# Altium PCB OSSI-1 LED Controller.PcbDoc
Units mil, origin at the board's own origin, x right, y up, seen from the top; angles counter-clockwise.
Board outline 3701 x 3465 mil, 2 copper layers (Top, Bottom), stack 61.811 mil thick; 80 components, 90 nets, 280 pads, 119 vias.
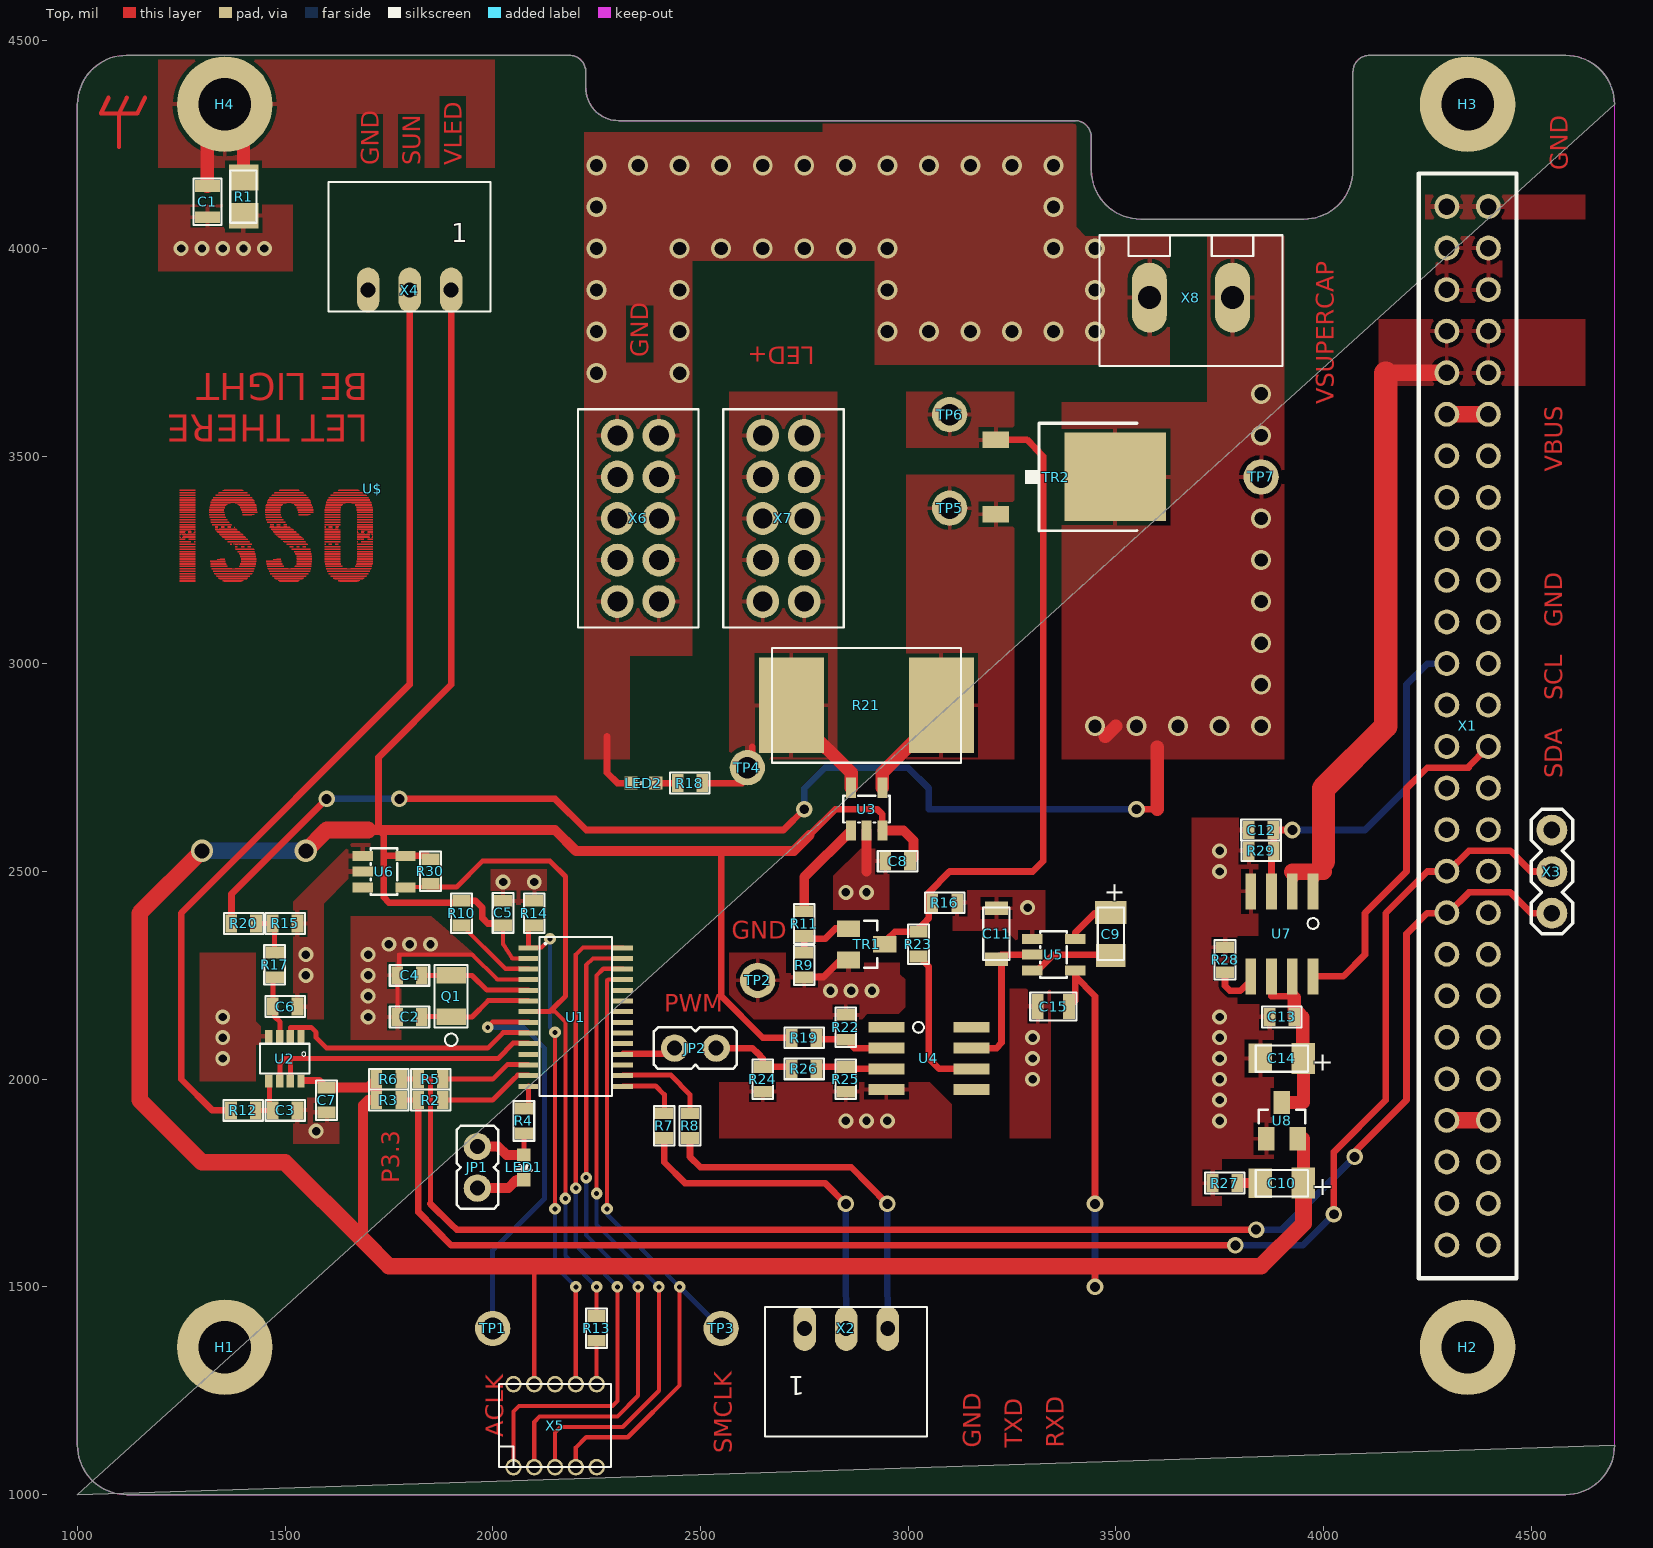
[diagram p0: Top view]
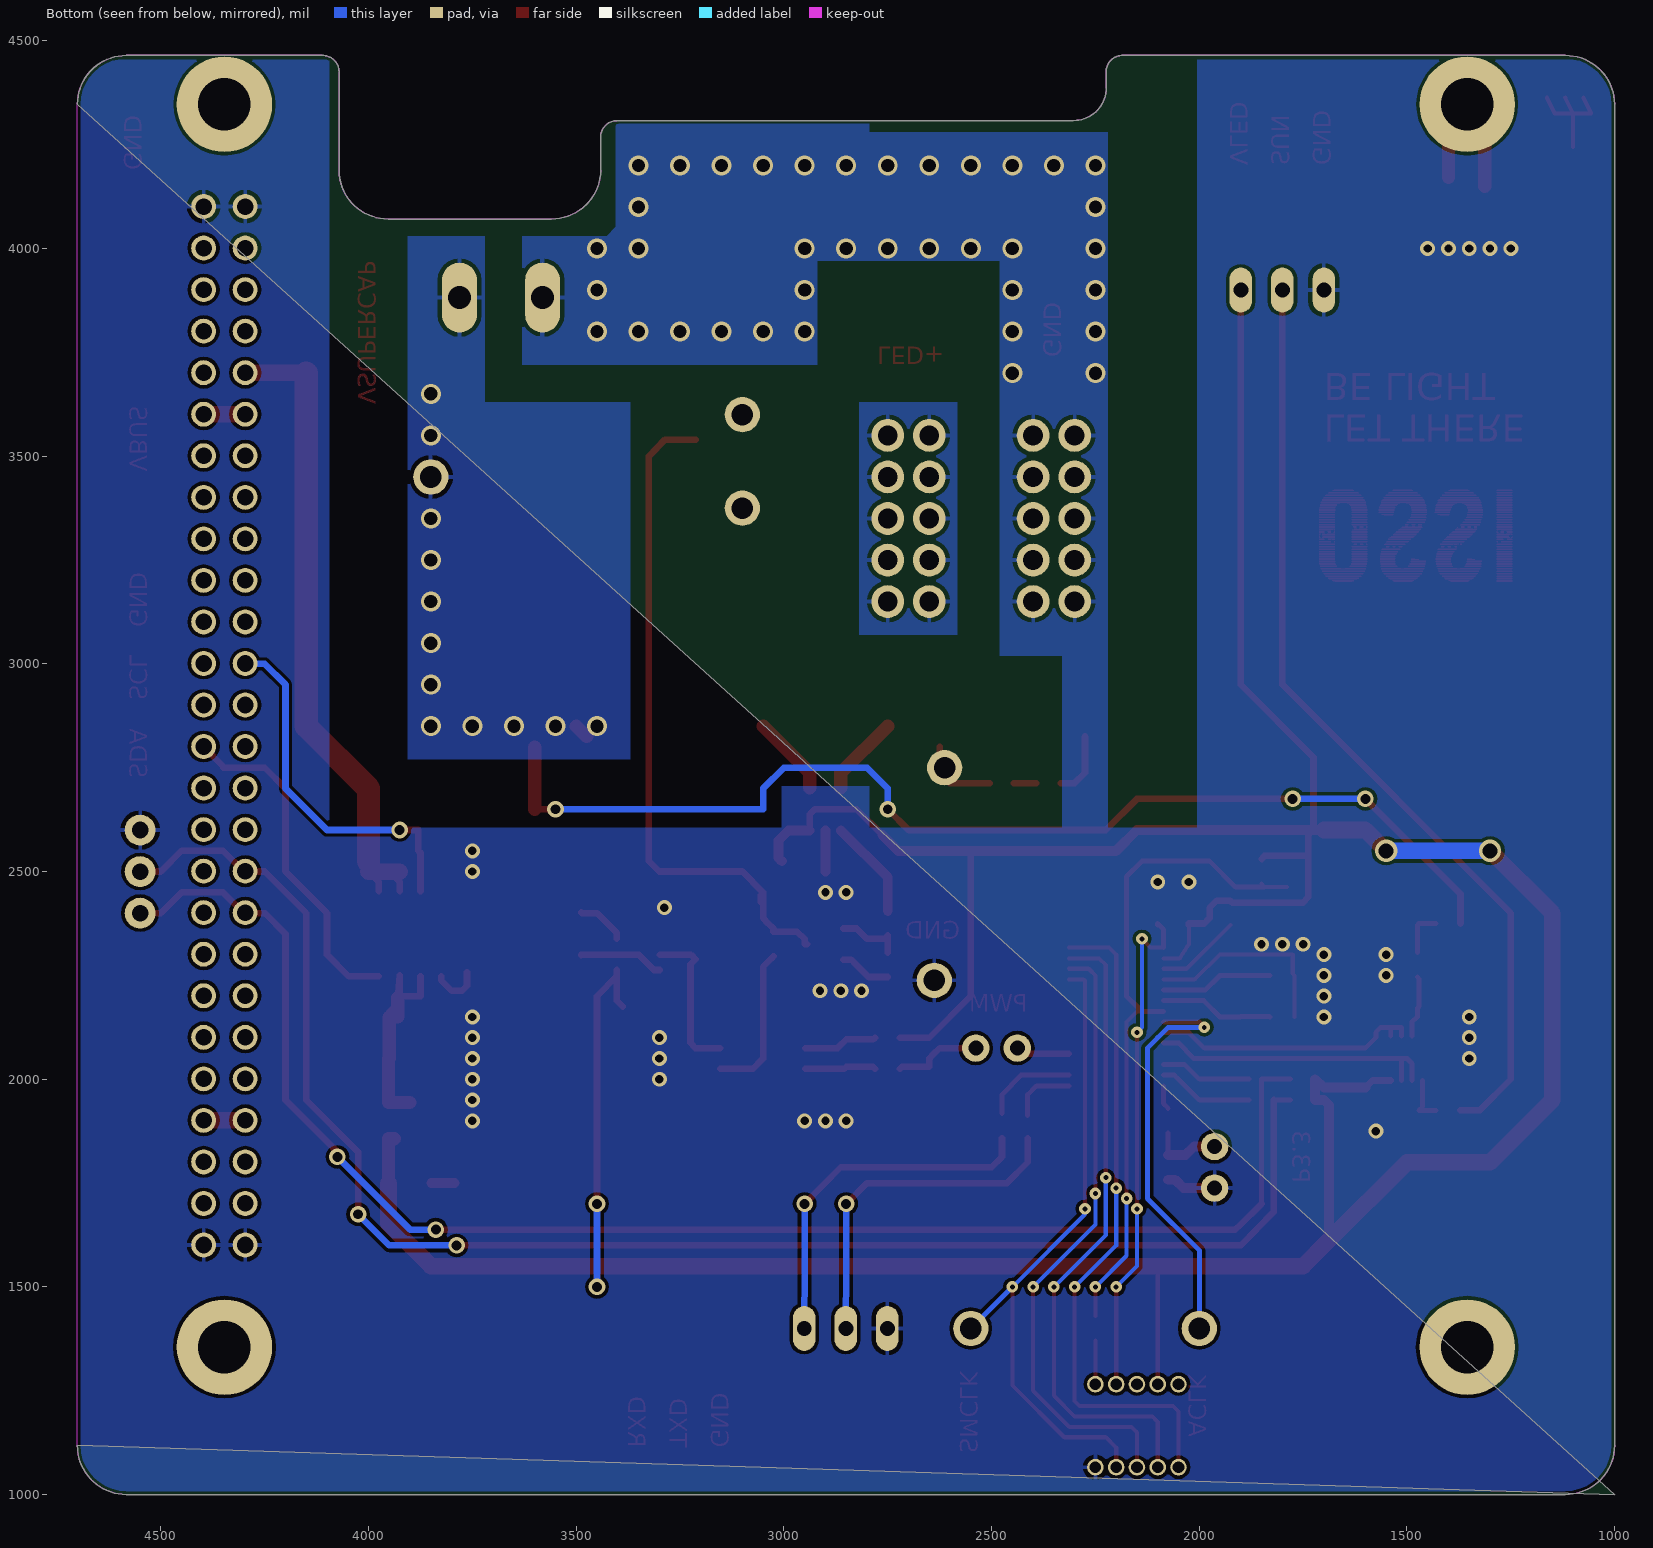
[diagram p1: Bottom view, seen from below]

## Layer stack, top to bottom
Top Solder: solder mask 0.4, Solder Resist, Dk 3.5
Top: signal copper 1.378
Dielectric 1: core 59.0551, FR-4, Dk 4.8
Bottom: signal copper 1.378
Bottom Solder: solder mask 0.4, Solder Resist, Dk 3.5

## Board outline
4701,1119 cw(c4582.5,1118.5) 4583,1000 1119,1000 cw(c1119,1119) 1000,1119 1000,4347 cw(c1118.5,4346.5) 1119,4465 2185,4465 cw(c2185,4426) 2224,4426 2224,4386 ccw(c2302.5,4386.5) 2303,4308 2733,4308 2736,4308 3402,4308 cw(c3401.5,4268.5) 3441,4268 3441,4189 ccw(c3559.5,4189.5) 3560,4071 3953,4071 ccw(c3953,4189) 4071,4189 4071,4426 cw(c4110.5,4425.5) 4111,4465 4583,4465 cw(c4583,4347) 4701,4347 1000,1000

## Design rules (kind name [scope] priority, off if disabled: settings)
Clearance mdViaVia [IsVia vs IsVia] p1: gap=8
Clearance mdPadVia [IsPad vs IsVia] p2: gap=8
Clearance mdPadPad [IsPad vs IsPad] p3: gap=8
Clearance mdWireVia [(InLayerClass('Signal Layers') AND IsTrack) vs IsVia] p4: gap=8
Clearance mdWirePad [(InLayerClass('Signal Layers') AND IsTrack) vs IsPad] p5: gap=8
Clearance mdWireWire [(InLayerClass('Signal Layers') AND IsTrack) vs (InLayerClass('Signal Layers') AND IsTrack)] p6: gap=8
Clearance [All] p7: gap=8
HoleSize [All] p1: absolutevalues=TRUE maxlimit=100000 minlimit=24 maxpercent=80.000 minpercent=20.000
HoleToHoleClearance [All] p1: gap=8 allowstackedmicrovias=TRUE
PolygonConnect ThermalVias [IsVia] p1: connectstyle=Direct reliefconductorwidth=10 reliefentries=4 polygonreliefangle="90 Angle" airgapwidth=10
PolygonConnect [All] p2: connectstyle=Relief reliefconductorwidth=10 reliefentries=4 polygonreliefangle="90 Angle" airgapwidth=10
RoutingVias [All] p1: holewidth=28 width=50 viastyle="Through Hole" minholewidth=28 minwidth=50 maxholewidth=28 maxwidth=50
SilkToSilkClearance [All] p1 off: silktosilkclearance=10
SilkToSolderMaskClearance [IsPad] p1 off: minsilkscreentomaskgap=10 clearancetoexposedcopper=TRUE
SolderMaskExpansion [All] p1: expansion=4
Width [All] p1: maxlimit=100000 minlimit=10 preferedwidth=10
26 further rules are at their usual default settings.

## Components (designator, comment, footprint, x,y, rotation, side; value= is the part's Value field where it differs from the comment)
C1 "DNP" C0805(2012) 1313,4113 r270 top
C2 "12.5pF" C0603(1608) 1800,2150 r180 top
C3 "100nF" C0603(1608) 1500,1925 r0 top
C4 "12.5pF" C0603(1608) 1800,2250 r180 top
C5 "100nF" C0603(1608) 2025,2400 r90 top
C6 "100nF" C0603(1608) 1500,2175 r0 top
C7 "100nF" C0603(1608) 1600,1950 r270 top
C8 "100nF" C0603(1608) 2975,2525 r180 top
C9 "10uF, LDO Tantal 16V" C1206(3216)-A 3488,2350 r270 top
C10 "10uF, LDO Tantal 16V" C1206(3216)-A 3900,1750 r180 top
C11 "4.7uF, 1206 Cap" C1206-GCM31 3213,2350 r90 top
C12 "1uF" C0603(1608) 3850,2600 r180 top
C13 "100nF" C0603(1608) 3900,2150 r180 top
C14 "10uF, LDO Tantal 16V" C1206(3216)-A 3900,2050 r180 top
C15 "1uF 0805" C0805(2012) 3350,2175 r180 top
H1 "" 3.2-PAD-ROUND 1355,1355 r0 top
H2 "" 3.2-PAD-ROUND 4347,1355 r0 top
H3 "" 3.2-PAD-ROUND 4347,4347 r0 top
H4 "" 3.2-PAD-ROUND 1355,4347 r0 top
JP1 "" JP1 1963,1788 r0 top
JP2 "" JP1 2488,2075 r90 top
LED1 "" LED-0603 2075,1788 r180 top
LED2 "" CHIPLED_0603 2363,2713 r90 top
Q1 "NX-3215" NX-3215 1900,2200 r90 top
R1 "DNP" WSL1206 1400,4125 r90 top
R2 "250" R0603(1608) 1850,1950 r0 top
R3 "10k" R0603(1608) 1750,1950 r180 top
R4 "1k" R0603(1608) 2075,1900 r270 top
R5 "250" R0603(1608) 1850,2000 r0 top
R6 "10k" R0603(1608) 1750,2000 r180 top
R7 "4.7k" R0603(1608) 2413,1888 r90 top
R8 "4.7k" R0603(1608) 2475,1888 r90 top
R9 "3k" R0603(1608) 2750,2275 r270 top
R10 "TBD" R0603(1608) 1925,2400 r270 top
R11 "5.1k" R0603(1608) 2750,2375 r270 top
R12 "1k" R0603(1608) 1400,1925 r180 top
R13 "4.7k" R0603(1608) 2250,1400 r90 top
R14 "47k" R0603(1608) 2100,2400 r270 top
R15 "100k" R0603(1608) 1500,2375 r0 top
R16 "DNP" R0603(1608) 3088,2425 r0 top
R17 "1k" R0603(1608) 1475,2275 r90 top
R18 "1.5k" R0603(1608) 2475,2713 r180 top
R19 "2.4k" R0603(1608) 2750,2100 r180 top
R20 "100k" R0603(1608) 1400,2375 r0 top
R21 "0.005, 2W RSENSE" R4527(12070) 2900,2900 r180 top
R22 "1.1k" R0603(1608) 2850,2125 r90 top
R23 "1k" R0603(1608) 3025,2325 r90 top
R24 "100k" R0603(1608) 2650,2000 r270 top
R25 "DNP" R0603(1608) 2850,2000 r270 top
R26 "1.5k" R0603(1608) 2750,2025 r180 top
R27 "0" R0603(1608) 3763,1750 r180 top
R28 "TBD" R0603(1608) 3763,2288 r270 top
R29 "100k" R0603(1608) 3850,2550 r0 top
R30 "100k" R0603(1608) 1850,2500 r90 top
TP1 "TP" TP-13 2000,1400 r0 top
TP2 "TP" TP-13 2638,2238 r0 top
TP3 "TP" TP-13 2550,1400 r0 top
TP4 "TP" TP-13 2613,2750 r0 top
TP5 "TP" TP-13 3100,3375 r0 top
TP6 "TP" TP-13 3100,3600 r0 top
TP7 "TP" TP-13 3850,3450 r0 top
TR1 "FDV301N" SOT23 2900,2325 r270 top
TR2 "FDD8896" TO252 3400,3450 r270 top
U1 "MSP430F2132" PW28 2200,2150 r270 top
U2 "OPA2347" SOT23-8DCN 1500,2050 r180 top
U3 "MAX4376" SOT23-5DBV 2900,2650 r0 top
U4 "LM7321" SO8 3050,2050 r270 top
U5 "MAX1682" SOT23-5DBV 3350,2300 r270 top
U6 "TPS3838" SOT23-5DBV 1738,2500 r270 top
U7 "MAX890L" SO8 3900,2350 r180 top
U8 "MCP1700_SOT23" SOT23 3900,1900 r0 top
U$ "" OSSILOGORECT1005 1711,3422 r180 top
X1 "ESQ-126-38-G-D" ESQ-126-XX-X-D 4347,2851 r0 top
X2 "5268-03" 5268-03 2851,1400 r180 top
X3 "" 1X03 4550,2400 r90 top
X4 "5268-03" 5268-03 1800,3900 r0 top
X5 "JTAG10PINMINI-H" M50-3200545 2150,1166 r0 top
X6 "ICCON_POWERCON" ICCON6643220-1 2350,3350 r0 top
X7 "ICCON_POWERCON" ICCON6643220-1 2700,3350 r0 top
X8 "WEIDMULLER" WEIDMULLER1760490000 3681,3882 r0 top

## Footprints (in the part's own frame and the unit in brackets; to place one, negate y for a bottom-side part, rotate by r counter-clockwise, add the part's x,y. Pads: shape width x height; smd on the part's side, far side on the other; paste and mask are expansions set on the pad)
1X03 [mil] "1X03"
  round 74 hole 40: 1(0,0) 2(100,0) 3(200,0)
  silkscreen extent -50,-50 250,50
3.2-PAD-ROUND [mil] "3.2-PAD-ROUND"
  round 230 hole 126: B3,2(0,0)
5268-03 [mil] "5268-03"
  oval 54x108 hole 36: 1(100,0) 2(0,0) 3(-100,0)
  silkscreen extent -195,-51 195,260
C0603(1608) [mil] "C0603(1608)"
  rect 28x44 smd: 1(-29.53,0) 2(30,0)
  silkscreen extent -47,-25 48,25
C0805(2012) [mil] "C0805(2012)"
  rect 28x60 smd: 1(-37.4,0) 2(38,0)
  silkscreen extent -55,-33 56,34
C1206(3216)-A [mil] "C1206(3216)-A"
  rect 56x75 smd: 1(-51.18,0)
  rect 56x71 smd: 2(52,0)
  silkscreen extent -63,-31 63,32
C1206-GCM31 [mil] "C1206-GCM31"
  rect 32x56 smd: P$1(-61.02,0) P$2(62,0)
  silkscreen extent -63,-31 63,32
CHIPLED_0603 [mil] "CHIPLED_0603"
  rect 32x32 smd: A(0,-29.53) C(0,30)
  silkscreen extent -5,0 5,10
ESQ-126-XX-X-D [mil] "ESQ-126-XX-X-D"
  round 60 hole 40: 1(-50,1250) 2(50,1250) 3(-50,1150) 4(50,1150) 5(-50,1050) 6(50,1050) 7(-50,950) 8(50,950) 9(-50,850) 10(50,850) 11(-50,750) 12(50,750) 13(-50,650) 14(50,650) 15(-50,550) 16(50,550) 17(-50,450) 18(50,450) 19(-50,350) 20(50,350) 21(-50,250) 22(50,250) 23(-50,150) 24(50,150) 25(-50,50) 26(50,50) 27(-50,-50) 28(50,-50) 29(-50,-150) 30(50,-150) 31(-50,-250) 32(50,-250) 33(-50,-350) 34(50,-350) 35(-50,-450) 36(50,-450) 37(-50,-550) 38(50,-550) 39(-50,-650) 40(50,-650) 41(-50,-750) 42(50,-750) 43(-50,-850) 44(50,-850) 45(-50,-950) 46(50,-950) 47(-50,-1050) 48(50,-1050) 49(-50,-1150) 50(50,-1150) 51(-50,-1250) 52(50,-1250)
  silkscreen extent -117,-1330 118,1330
ICCON6643220-1 [mil] "ICCON6643220-1"
  round 79 hole 48: 1(-50,200) 2(-50,100) 3(-50,0) 4(-50,-100) 5(-50,-200) 6(50,-200) 7(50,-100) 8(50,0) 9(50,100) 10(50,200)
  silkscreen extent -145,-262 145,263
JP1 [mil] "JP1"
  round 66 hole 36: 1(0,-50) 2(0,50)
  silkscreen extent -50,-100 50,100
LED-0603 [mil] "LED-0603"
  rect 32x32 smd: A(0,-29.53) C(0,30)
  silkscreen extent -18,-6 19,7
M50-3200545 [mil] "M50-3200545"
  round 40 hole 28: 1(-100,-100) 2(-100,100) 3(-50,-100) 4(-50,100) 5(0,-100) 6(0,100) 7(50,-100) 8(50,100) 9(100,-100) 10(100,100)
  silkscreen extent -135,-100 135,100
NX-3215 [mil] "NX-3215"
  rect 40x71 smd: 1(-49.21,0) 2(50,0)
  silkscreen extent -120,-39 75,40
OSSILOGORECT1005 [mil] "OSSILOGORECT1005"
  Top drawing of 1356 lines, arcs and shapes, not listed
PW28 [mil] "PW28"
  rect 12x48 smd: 1(-166.5,-114.49) 2(-140.91,-114.49) 3(-115.32,-114.49) 4(-89.73,-114.49) 5(-64.14,-114.49) 6(-38.55,-114.49) 7(-12.96,-114.49) 8(13,-114.49) 9(39,-114.49) 10(64,-114.49) 11(90,-114.49) 12(116,-114.49) 13(141,-114.49) 14(167,-114.49) 15(167,114) 16(141,114) 17(116,114) 18(90,114) 19(64,114) 20(39,114) 21(13,114) 22(-12.96,114) 23(-38.55,114) 24(-64.14,114) 25(-89.73,114) 26(-115.32,114) 27(-140.91,114) 28(-166.5,114)
  silkscreen extent -192,-87 190,87
R0603(1608) [mil] "R0603(1608)"
  rect 28x44 smd: 1(-29.53,0) 2(30,0)
  silkscreen extent -47,-25 48,25
R4527(12070) [mil] "R4527(12070)"
  rect 156x230 smd: P$1(-180.12,0) P$2(181,0)
  silkscreen extent -228,-138 228,138
SO8 [mil] "SO8"
  rect 26x87 smd: 1(-75,-102.36) 2(-25,-102.36) 3(25,-102.36) 4(75,-102.36) 5(75,103) 6(25,103) 7(-25,103) 8(-75,103)
  silkscreen extent -88,-38 -62,-12
SOT23 [mil] "SOT23"
  rect 40x56 smd: 1(-37.4,-43.31) 2(38,-43.31) 3(0,44)
  silkscreen extent -56,-6 56,26
SOT23-5DBV [mil] "SOT23-5DBV"
  rect 24x49 smd: 1(-37.4,-51.18) 2(0,-51.18) 3(38,-51.18) 4(38,52) 5(-37.4,52)
  silkscreen extent -56,-32 56,32
SOT23-8DCN [mil] "SOT23-8DCN"
  rect 18x32 smd: 1(-38.39,-53.15) 2(-12.8,-53.15) 3(13,-53.15) 4(39,-53.15) 5(39,54) 6(13,54) 7(-12.8,54) 8(-38.39,54)
  silkscreen extent -59,-35 60,36
TO252 [mil] "TO252"
  rect 213x245 smd: D(0,99)
  rect 40x63 smd: G(-89.76,-188.98) S(90,-188.98)
  silkscreen extent -129,-119 130,151
TP-13 [mil] "TP-13"
  round 85 hole 52: TP(0,0)
WEIDMULLER1760490000 [mil] "WEIDMULLER1760490000"
  oval 84x168 hole 56: 1(100,0) 2(-100,0)
  silkscreen extent -220,-165 220,150
WSL1206 [mil] "WSL1206"
  rect 62x71 smd: P$1(-45.87,0) P$2(46,0)
  silkscreen extent -63,-31 63,32

## Part data
C1 C15: library part C0805(2012)
C2 C3 C4 C5 C6 C7 C8 C12 C13: library part C0603(1608)
C9 C10 C14: library part C1206(3216)-A
C11: library part C1206-GCM31
H1 H2 H3 H4: library part 3.2-PAD-ROUND
JP1 JP2: library part JP1
LED1: library part LED-0603
LED2: library part CHIPLED_0603
R1: library part WSL1206
R2 R3 R4 R5 R6 R7 R8 R9 R10 R11 R12 R13 R14 R15 R16 R17 R18 R19 R20 R22 R23 R24 R25 R26 R27 R28 R29 R30: library part R0603(1608)
R21: library part R4527(12070)
TP1 TP2 TP3 TP4 TP5 TP6 TP7: library part TP-13
TR1 U8: library part SOT23
TR2: library part TO252
U1: library part PW28
U2: library part SOT23-8DCN
U3 U5 U6: library part SOT23-5DBV
U4 U7: library part SO8
U$: library part OSSILOGORECT1005
X1: library part ESQ-126-XX-X-D
X3: library part 1X03
X5: library part M50-3200545
X6 X7: library part ICCON6643220-1
X8: library part WEIDMULLER1760490000

## Via types
v1: diameter 48/48 (per signal layer), hole 32, Top to Bottom, 49 vias
v2: diameter 36/36 (per signal layer), hole 20, Top to Bottom, 40 vias
v3: diameter 28/28 (per signal layer), hole 12, Top to Bottom, 15 vias
v4: diameter 40/40 (per signal layer), hole 24, Top to Bottom, 13 vias
v5: diameter 54/54 (per signal layer), hole 36, Top to Bottom, 2 vias

## Nets (pads, with @x,y where several pads share a name; then routed paths per layer and width w, separated by ;. In a path a pad name is that pad's centre, name@x,y a point inside that pad or via, vN(x,y) a via of type N, cw(c..) or ccw(c..) an arc to the next point about the centre after c; other vN are vias at no path point)
3.3VLED: C5.1 C7.1 C8.1 C10.1 C15.1 R3.2 R6.2 R10.1 R19.2 R30.2 U1.2 U2.8 U3.3 U5.4 U6.5 U8.2 X4.1 X5.4 | length 10294.5
  Top w10: C5.1@2025,2371 2025,2325 2047,2291 U1.2@2086,2291 ; X5.4 2100,1550
  Top w16: U2.8@1539,1997 1583,1997 C7.1@1600,1980 ; R30.2 1843,2538 1789,2538 1738,2538 ; X4.1 1900,2950 1725,2775 1725,2600 1738,2588 1738,2538 ; C5.1@2025,2371 2025,2375 1988,2375 1975,2388 1975,2413 1958,2430 1925,2430 1921,2425 1750,2425 1738,2438 1738,2538 ; 2550,2550 2550,2200 2650,2100 R19.2@2721,2100 ; 2763,2588 2825,2650 2925,2650 2938,2638 U3.3@2938,2599 ; C15.1@3388,2175 3402,2189 3402,2263 3402,2249 3450,2200 v4(3450,1700) ; v4(3450,1500) 3450,1550
  Top w24: C7.1@1600,1980 1700,1980 1721,2000 1721,1950 1700,1950 1688,1938 1688,1613 ; 1700,2600 1725,2600 2150,2600 2200,2550 2550,2550 2725,2550 2763,2588 ; U3.3@2938,2599 2989,2599 3013,2575 3013,2533 C8.1@3005,2525
  Top w32: U8.2@3938,1857 3952,1857 C10.1@3952,1750
  Top w40: v5(1300,2550) 1150,2400 1150,1950 1300,1800 1500,1800 1688,1613 1750,1550 2100,1550 3450,1550 3850,1550 3952,1652 C10.1@3952,1750 ; v5(1550,2550) 1600,2600 1700,2600
  Bottom w16: v4(3450,1500) v4(3450,1700)
  Bottom w40: v5(1300,2550) v5(1550,2550)
3.3VOBC: X1.45 X1.46 | length 100
  Top w40: X1.45 X1.46
ACLK_OUT: TP1.TP U1.8 | length 988.2
  Top w12: v3(1988,2125) 2000,2138 U1.8@2086,2138
  Bottom w12: v3(1988,2125) 2075,2125 2100,2100 2125,2075 2125,1713 2000,1588 TP1.TP
ADC1: U1.9 U2.1 U2.2 | length 659.7
  Top w12: U2.2@1513,2104 1513,2125 1538,2125 ; U2.1@1539,2104 1539,2125 1538,2125 ; U1.9@2086,2112 2025,2112 1988,2075 1600,2075 1575,2100 1575,2113 1563,2125 1538,2125
ADC2: U1.10 U2.6 U2.7 | length 712.6
  Top w12: U2.6@1488,1997 1488,2025 1488,2038 1500,2050 1513,2050 ; U2.7@1513,1997 1513,2050 ; U1.10@2086,2087 2049,2087 2013,2050 1600,2050 1550,2050 1513,2050
ANT_DEPLOY1: X1.19
ANT_DEPLOY2: X1.20
BAT_-CHRG: X1.42
BAT_-FAULT: X1.44
BAT_-ON: X1.38
BAT_TEMP: X1.47
BEACON_-FAULT: X1.30
BEACON_OFF: X1.24
BEACON_SCL: X1.37
BEACON_SDA: X1.39
BUS_CS: X1.27
COMMS_-FAULT: X1.32
COMMS_OFF: X1.25
COMMS_SCL: X1.41
COMMS_SDA: X1.43
GND: C1.2 C2.2 C3.2 C4.2 C5.2 C6.2 C7.2 C8.2 C11.P$2 C12.2 C13.2 C14.2 C15.2 JP1.1 LED1.C LED2.C R1.P$1 R9.2 R14.1 R15.2 R16.2 R22.2 R24.2 R25.2 R27.2 R28.1 R29.1 TP2.TP TR1.2 U1.4 U2.4 U3.2 U4.4 U5.1 U6.1 U6.2 U7.4 U8.1 X1.1 X1.2 X1.51 X1.52 X2.1 X3.3 X4.3 X5.9 X6.1 X6.2 X6.3 X6.4 X6.5 X6.6 X6.7 X6.8 X6.9 X6.10 X8.2 | length 986
  Top w10: C2.2@1771,2150 1771,2250 1775,2255 1775,2300 1950,2300 2011,2240 U1.4@2086,2240
  Top w16: 2275,2825 2275,2738 2300,2713 LED2.C ; R9.2@2750,2246 2796,2246 2825,2275 2838,2288 TR1.2@2857,2288
  Top w24: JP1.1 2038,1738 2058,1758 LED1.C ; 2900,2500 U3.2@2900,2599
  other v1: 2250,3700 2450,3700 2250,3800 2450,3800 2950,3800 3050,3800 3150,3800 3250,3800 3350,3800 3450,3800 2250,3900 2450,3900 2950,3900 3450,3900 2250,4000 2450,4000 2550,4000 2650,4000 2750,4000 2850,4000 2950,4000 3350,4000 3450,4000 2250,4100 3350,4100 2250,4200 2350,4200 2450,4200 2550,4200 2650,4200 2750,4200 2850,4200 2950,4200 3050,4200 3150,4200 3250,4200 3350,4200
  other v2: 1575,1875 2850,1900 2900,1900 2950,1900 3750,1900 3750,1950 3300,2000 3750,2000 1350,2050 3300,2050 3750,2050 1350,2100 3300,2100 3750,2100 1350,2150 1700,2150 3750,2150 1700,2200 2813,2213 2863,2213 2913,2213 1550,2250 1700,2250 1550,2300 1700,2300 1750,2325 1800,2325 1850,2325 3288,2413 2850,2450 2900,2450 2025,2475 2100,2475 3750,2500 3750,2550 1250,4000 1300,4000 1350,4000 1400,4000 1450,4000
LED_-FAULT: U7.8 X1.28 | length 833.1
  Top w16: U7.8@3975,2248 4048,2248 4100,2300 4100,2400 4200,2500 4200,2700 4250,2750 4347,2750 ; X1.28 4347,2750 ; 4347,2750 4350,2750 4347,2750
LED_OFF: C12.1 R29.2 U7.3 X1.23 | length 897.5
  Top w16: U7.3@3875,2453 3875,2546 R29.2 3880,2600 3888,2600 v4(3925,2600)
  Bottom w16: v4(3925,2600) 4100,2600 4200,2700 4200,2950 4250,3000 X1.23@4300,3000 ; X1.23@4288,3000 X1.23@4300,3000 ; X1.23 4300,3001 X1.23@4300,3000
LED_SCL: R2.1 R3.1 X1.33 X3.2 | length 3841.1
  Top w12: R3.1@1780,1950 R2.1@1821,1950
  Top w16: R2.1@1821,1950 1821,1680 1900,1600 3550,1600 3600,1600 v4(3788,1600) ; v4(4025,1675) 4025,1825 4150,1950 4150,2400 4250,2500 X1.33@4297,2500 ; X3.2 4500,2500 4450,2550 4350,2550 4300,2500 X1.33@4297,2500 ; X1.33@4297,2500 X1.33 X1.33@4297,2500
  Bottom w16: v4(3788,1600) 3950,1600 v4(4025,1675)
LED_SDA: R5.1 R6.1 X1.35 X3.1 | length 3700.4
  Top w12: R6.1@1780,2000 1821,2000 1850,2000 1850,1700
  Top w16: 1850,1700 1900,1650 1913,1638 3538,1638 3600,1638 v4(3838,1638) ; v4(4075,1813) 4075,1825 4200,1950 4200,2350 4250,2400 X1.35@4297,2400 ; X3.1 4500,2400 4450,2450 4350,2450 4301,2401 X1.35 X1.35@4297,2400 ; X1.35@4297,2400 4300,2400 X1.35@4297,2400
  Bottom w16: v4(3838,1638) 3900,1638 v4(4075,1813)
N$1: 
N$2: 
N$3: U1.28 X5.1 | length 1637.8
  Top w10: v3(2200,1738) 2200,1800 2200,2300 2217,2317 U1.28@2314,2317 ; v3(2300,1500) 2300,1300 2300,1225 2288,1213 2063,1213 2050,1200 X5.1 ; X5.1 2050,1063 X5.1
  Bottom w10: v3(2200,1738) 2200,1600 v3(2300,1500)
N$4: R10.2 U1.3 | length 204.2
  Top w10: R10.2@1925,2371 2031,2266 U1.3@2086,2266
N$5: C13.1 C14.1 U7.6 U7.7 U8.3 | length 541.2
  Top w10: C14.1@3950,2050 C14.1@3952,2050
  Top w16: U7.6@3875,2248 3875,2200 3925,2200 U7.7@3925,2250 ; 3930,2196 U7.7@3925,2250 ; U7.7@3925,2250 3925,2248 U7.7@3925,2250
  Top w32: U8.3 3952,1944 C14.1@3952,2050 ; C13.1@3930,2150 C13.1@3930,2171 ; 3930,2196 C13.1@3930,2171 ; C14.1@3950,2050 3950,2150 C13.1@3930,2171
N$6: R16.1 R23.2 TP6.TP TR1.3 TR2.G | length 1645.7
  Top w12: 3050,2450 3058,2443 R16.1@3058,2425
  Top w16: TR1.3 2950,2325 2950,2338 2968,2355 R23.2 3025,2363 3038,2375 3050,2388 3050,2450 3100,2500 3300,2500 3325,2525 3325,2763 3325,3500 3286,3540 TR2.G@3212,3540
N$7: C6.1 R17.1 U2.3 | length 150.8
  Top w12: R17.1@1475,2246 1471,2241 1471,2175 1475,2171 1475,2150 1488,2138 U2.3@1488,2104
N$8: C3.1 R12.1 U2.5 | length 116.7
  Top w12: R12.1@1430,1925 1471,1925 1462,1934 U2.5@1462,1997
N$9: R25.1 R26.1 U4.3 | length 172.1
  Top w16: R26.1@2780,2025 2785,2030 2850,2030 2855,2025 U4.3@2948,2025
N$10: R28.2 U7.5 | length 120.3
  Top w16: R28.2 3763,2225 3775,2213 3800,2213 3825,2238 U7.5@3825,2248
N$11: R15.1 R17.2 R20.2 | length 112.7
  Top w12: R20.2 1471,2375 1475,2371 R17.2
N$12: R18.1 R21.P$2 TP4.TP U3.5 X7.1 X7.2 X7.3 X7.4 X7.5 X7.6 X7.7 X7.8 X7.9 X7.10 | length 387.5
  Top w16: R18.1@2505,2713 2600,2713 2625,2738 2625,2800
  Top w32: R21.P$2@2750,2850 2863,2738 U3.5@2863,2702
N$13: C11.P$1 U4.7 U5.2 | length 374.2
  Top w16: U4.7 3213,2075 3225,2088 3225,2277 C11.P$1 3224,2300 U5.2@3299,2300
N$14: R23.1 U4.6 | length 376.8
  Top w16: R23.1@3030,2291 3025,2296 3050,2271 3050,2050 3075,2025 U4.6
N$15: U1.27 X5.3 | length 1569.5
  Top w10: X5.3 2100,1175 2113,1188 2300,1188 2350,1238 v3(2350,1500) ; v3(2225,1763) 2225,1800 2225,2275 2241,2291 U1.27@2314,2291
  Bottom w10: v3(2225,1763) 2225,1625 v3(2350,1500)
N$16: R21.P$1 TP5.TP TR2.S U3.4 | length 194.4
  Top w32: U3.4 2938,2738 R21.P$1@3050,2850
N$17: C10.2 R27.1 | length 56
  Top w24: R27.1@3793,1750 3800,1750 C10.2@3849,1750
N$18: R19.1 R22.1 U4.2 | length 178.1
  Top w16: R19.1@2780,2100 2785,2096 2850,2096 2871,2075 U4.2@2948,2075
N$19: C4.1 Q1.2 U1.5 | length 270.2
  Top w12: C4.1@1830,2250 1831,2250 Q1.2 1901,2250 1950,2250 1986,2215 U1.5@2086,2215
N$20: C2.1 Q1.1 U1.6 | length 273
  Top w12: C2.1@1830,2150 1831,2151 1900,2151 1901,2150 1950,2150 1989,2189 U1.6@2086,2189
N$21: JP1.2 LED1.A R4.2 | length 173.3
  Top w12: LED1.A@2075,1818 R4.2@2075,1871
  Top w24: JP1.2 2013,1838 2033,1818 LED1.A@2075,1818
N$22: R5.2 U1.12 | length 220.5
  Top w12: R5.2 2000,2000 2035,2035 U1.12@2086,2035
N$23: R2.2 U1.13 | length 230.9
  Top w12: R2.2 2000,1950 2050,2000 2060,2010 U1.13@2086,2010
N$24: R11.1 U3.1 | length 241.1
  Top w24: R11.1@2750,2405 2750,2487 U3.1@2863,2599
N$25: R4.1 U1.14 | length 58.6
  Top w12: R4.1@2075,1930 2086,1941 U1.14@2086,1984
N$26: C9.2 U5.3 | length 204.7
  Top w16: U5.3@3299,2263 3313,2263 3350,2300 3487,2300 C9.2@3488,2299
N$27: C9.1 U5.5 | length 121.1
  Top w16: U5.5@3402,2338 3402,2352 3450,2400 3487,2400 C9.1@3488,2402
N$28: R8.2 U1.16 | length 225.8
  Top w12: U1.16@2314,2010 2429,2010 2475,1963 R8.2
N$29: LED2.A R18.2 | length 117
  Top w16: R18.2@2446,2713 LED2.A@2393,2713 ; LED2.A@2393,2713 2425,2713 LED2.A@2393,2713
N$30: R9.1 R11.2 TR1.1 | length 161.7
  Top w16: R9.1@2750,2305 2750,2346 2758,2338 2800,2338 2825,2363 TR1.1@2857,2363
N$31: U1.26 X5.5 | length 1508.2
  Top w10: X5.5 2150,1150 2163,1163 2313,1163 2400,1250 v3(2400,1500) ; v3(2250,1725) 2250,1800 2250,2250 2266,2266 U1.26@2314,2266
  Bottom w10: v3(2250,1725) 2250,1650 v3(2400,1500)
N$32: R13.1 X5.10 | length 105
  Top w10: X5.10 R13.1@2250,1371
N$33: JP2.2 U1.18 | length 129.8
  Top w16: U1.18@2314,2061 2424,2061 JP2.2
N$39: R7.2 U1.15 | length 162.7
  Top w12: U1.15@2314,1984 2392,1984 2413,1963 2413,1925 R7.2 ; R7.2 2413,1913 R7.2
N$56: 
N$58:  | length 75
  Top w10: 1100,4244 1100,4319
N$59:  | length 214
  Top w10: 1075,4363 1057,4325 1100,4325 ; 1119,4363 1100,4325 ; 1163,4363 1144,4325 1100,4325
OBC_-FAULT: X1.34
OBC_OFF: X1.26
PANELTEMP_SCL: X1.29
PANELTEMP_SDA: X1.31
PWM: JP2.1 R24.1 R26.2 | length 215.5
  Top w16: JP2.1 2625,2075 2640,2061 2650,2050 2650,2030 2716,2030 R26.2@2721,2025
RESET_LED: R13.2 R30.1 U1.7 U6.4 | length 1616.4
  Top w10: U6.4@1789,2463 1843,2463 R30.1@1850,2471 ; 2138,2163 2150,2163 2175,2138 2175,1800 v3(2175,1713) ; R13.2 2250,1450 v3(2250,1500)
  Top w12: R30.1@1843,2463 1913,2463 1975,2525 2138,2525 2175,2488 2175,2200 2150,2175 2138,2163 U1.7@2086,2163
  Bottom w10: v3(2175,1713) 2175,1575 v3(2250,1500)
RXD: R8.1 X2.3 | length 867.1
  Top w16: R8.1@2475,1858 2475,1813 2500,1788 2863,1788 v4(2950,1700)
  Bottom w16: v4(2950,1700) 2950,1551 X2.3
SC_-ON: X1.40
SC_-PFO: X1.48
SCCHG_EN: X1.21
SCOUT_-PG: X1.50
SCOUT_EN: X1.22
SMCLK_OUT: TP3.TP U1.25 X5.7 | length 1587.6
  Top w10: X5.7 2200,1113 2225,1138 2325,1138 2450,1263 v3(2450,1500) ; v3(2275,1688) 2275,1800 2275,2238 2278,2240 U1.25@2314,2240
  Bottom w10: v3(2275,1688) 2275,1675 v3(2450,1500)
  Bottom w12: v3(2450,1500) TP3.TP
SOLAR_-ON: X1.36
SOLAR_CS1: X1.15
SOLAR_CS2: X1.14
SOLAR_CS3: X1.17
SOLAR_CS4: X1.16
SOLAR_CS5: X1.18
STRUT_GND: C1.1 H4.B3,2 R1.P$2 | length 292
  Top w32: C1.1@1313,4150 1313,4300 ; R1.P$2 1400,4313
SUN: R12.2 X4.2 | length 2279.9
  Top w16: R12.2@1371,1925 1325,1925 1250,2000 1250,2400 1800,2950 X4.2
SUPERCAP_TEMP: X1.49
TEST: R14.2 U1.1 X5.8 | length 1234.2
  Top w10: U1.1@2086,2317 2117,2317 v3(2138,2338) ; v3(2150,1688) 2150,1738 2150,1800 v3(2150,2113) ; X5.8 v3(2200,1500)
  Top w12: U1.1@2086,2317 2086,2361 R14.2@2100,2375 ; R14.2@2100,2371 R14.2@2100,2375 ; R14.2@2100,2371 R14.2@2100,2375 ; R14.2@2100,2371 R14.2@2100,2375
  Bottom w10: v3(2138,2338) 2138,2313 2138,2125 v3(2150,2113) ; v3(2150,1688) 2150,1550 v3(2200,1500)
TXD: R7.1 X2.2 | length 836.4
  Top w16: R7.1@2413,1858 2413,1800 2463,1750 2800,1750 v4(2850,1700)
  Bottom w16: v4(2850,1700) 2850,1550 X2.2
VBAT: X1.11 X1.12 | length 100
  Top w40: X1.11 X1.12
VBUS: U7.1 U7.2 X1.7 X1.8 X1.9 X1.10 | length 1624.3
  Top w16: U7.2@3925,2453 3925,2475 3950,2500 ; U7.1@3975,2453 3975,2475 4000,2500
  Top w24: 4000,2500 4000,2550
  Top w40: 3925,2500 3950,2500 4000,2500 ; 4150,3700 4151,3701 X1.9
  Top w56: 4000,2525 4000,2550 4000,2700 4150,2850 4150,3700
VSOLAR: X1.3 X1.4 X1.5 X1.6
VSUPERCAP: R20.1 TP7.TP TR2.D X8.1 | length 2773.4
  Top w16: R20.1@1371,2375 1371,2446 v4(1600,2675) ; v4(1775,2675) 2150,2675 2225,2600 2700,2600 v4(2750,2650) ; v4(3550,2650) 3600,2650
  Top w32: 3475,2825 3500,2850 ; 3600,2650 3600,2800
  Bottom w16: v4(1600,2675) v4(1775,2675) ; v4(2750,2650) 2750,2700 2800,2750 3000,2750 3050,2700 3050,2650 v4(3550,2650)
  other v1: 3450,2850 3550,2850 3650,2850 3750,2850 3850,2850 3850,2950 3850,3050 3850,3150 3850,3250 3850,3350 3850,3550 3850,3650
pads on no net: H1.B3,2 H2.B3,2 H3.B3,2 U1.11 U1.17 U1.19 U1.20 U1.21 U1.22 U1.23 U1.24 U4.1 U4.5 U4.8 U6.3 X1.13 X5.2 X5.6

## Polygon pours and split planes (outlines as drawn)
VSOLAR on Top "Top-VSOLAR" (solid, remove dead copper, pour order 2): 4300,4030 4430,4030 4430,3870 4270,3870 4270,4030
GND on Top "Top-GND" (solid, remove dead copper, pour order 4): 3630,4030 3630,3720 2920,3720 2920,3970 2480,3970 2480,3020 2330,3020 2330,2770 2220,2770 2220,4280 2795,4280 2795,4455 3405,4455 3405,4052.07 3427.07,4030
GND on Top "Top-GND 1" (solid, remove dead copper, pour order 10): 1780,2095 1780,2393 1658,2393 1658,2095
GND on Top "Top-GND 2" (solid, remove dead copper, pour order 12): 3843,2630 3843,2345 3793,2345 3793,2180 3880,2180 3880,1808 3755,1808 3755,1695 3683,1695 3683,2630
GND on Top "Top-GND 3" (solid, remove dead copper, pour order 14): 1995,2505 1995,2420 2130,2420 2130,2505
GND on Top "Top-GND 4" (solid, remove dead copper, pour order 16): 1520,2145 1520,2427.07 1660.93,2568 1705,2568 1705,2483 1652.09,2483 1593,2422.95 1593,2145
GND on Top "Top-GND 5" (solid, remove dead copper, pour order 18): 1520,1955 1520,1845 1630,1845 1630,1930 1580,1930 1580,1955
GND on Top "Top-GND 6" (solid, remove dead copper, pour order 20): 1468,2083 1468,2118 1452.07,2118 1430,2140.07 1430,2305 1295,2305 1295,1995 1430,1995 1430,2083
GND on Top "Top-GND 7" (solid, remove dead copper, pour order 22): 2993,2172.81 2993,2240.19 2980,2252.19 2980,2280 2822.93,2280 2797.93,2255 2705,2255 2705,2305 2570,2305 2570,2145 2890.19,2145 2902.19,2158 2976.95,2158
GND on Top "Top-GND 8" (solid, remove dead copper, pour order 24): 2545,1993 3052.07,1993 3105,1940.07 3105,1858 2545,1858
GND on Top "Top-GND 9" (solid, remove dead copper, pour order 26): 3108,2455 3108,2358 3235.93,2358 3260.93,2333 3330,2333 3330,2455
GND on Top "Top-GND 10" (solid, remove dead copper, pour order 28): 3343,2218 3245,2218 3245,1858 3343,1858
GND on Top "Top-GND 11" (solid, remove dead copper, pour order 30): 2955,2408 2955,2555 2885.95,2555 2820,2490.09 2820,2408
GND on Top "Top-GND 12" (solid, remove dead copper, pour order 32): 1745,2393 1851.89,2393 1963.25,2295 1745,2295
GND on Top "Top-GND 13" (solid, remove dead copper, pour order 34): 1195,4105 1195,3945 1518,3945 1518,4105
GND on Top "Top-GND 14" (solid, remove dead copper, pour order 36): 4245,4130 4630,4130 4630,4070 4245,4070
VBUS on Top "Top-VBUS" (solid, remove dead copper, pour order 38): 4133,3830 4630,3830 4630,3670 4133,3670
VSUPERCAP on Top "Top-VSUPERCAP" (solid, remove dead copper, pour order 40): 3720,4030 3720,3630 3370,3630 3370,2770 3905,2770 3905,4030
STRUT_GND on Top "Top-STRUT_GND" (solid, remove dead copper, pour order 44): 1195,4195 1195,4455 2005,4455 2005,4195
N$6 on Top "Top-N$6" (solid, remove dead copper, pour order 46): 3255,3520 3255,3655 2995,3655 2995,3520
N$12 on Top "Top-N$12" (solid, remove dead copper, pour order 48): 2570,3655 2570,2708 2655,2708 2655,2770 2830,2770 2830,3655
N$16 on Top "Top-N$16" (solid, remove dead copper, pour order 52): 2995,3455 2995,2770 3255,2770 3255,3455
GND on Bottom "Bottom-GND" (solid, remove dead copper, pour order 6): 3630,4030 3630,3720 2920,3720 2920,3970 2480,3970 2480,3020 2330,3020 2330,2470 2220,2470 2220,4280 2795,4280 2795,4455 3405,4455 3405,4052.07 3427.07,4030
GND on Bottom "Bottom-GND 1" (solid, remove dead copper, pour order 8): 4095,4455 4095,2605 3005,2605 3005,2705 2795,2705 2795,2605 2005,2605 2005,4455 995,4455 995,995 4705,995 4705,4455
VSUPERCAP on Bottom "Bottom-VSUPERCAP" (solid, remove dead copper, pour order 42): 3720,4030 3720,3630 3370,3630 3370,2770 3905,2770 3905,4030
N$12 on Bottom "Bottom-N$12" (solid, remove dead copper, pour order 50): 2583,3630 2583,3070 2818,3070 2818,3630

## Keep-outs
Keep-Out Layer:
  lines w0: 1000,1119 ccw(c1119,1119) 1119,1000 4583,1000 ccw(c4582.5,1118.5) 4701,1119 4701,4347 ccw(c4583,4347) 4583,4465 4111,4465 ccw(c4110.5,4425.5) 4071,4426 4071,4189 cw(c3953,4189) 3953,4071 3560,4071 cw(c3559.5,4189.5) 3441,4189 3441,4268 ccw(c3401.5,4268.5) 3402,4308 2736,4308 2733,4308 2303,4308 cw(c2302.5,4386.5) 2224,4386 2224,4426 ccw(c2185,4426) 2185,4465 1119,4465 ccw(c1118.5,4346.5) 1000,4347 1000,1119

## Other copper
Top:
  text "GND" at 1725,4200 h42.5 r90
  text "SUN" at 1825,4200 h42.5 r90
  text "VLED" at 1925,4200 h42.5 r90
  text "GND" at 4588,4188 h42.5 r90
  text "LED+" at 2775,3763 h42.5 r180
  text "GND" at 2375,3738 h42.5 r90
  text "BE LIGHT" at 1700,3700 h64.6 r180
  text "VSUPERCAP" at 4025,3625 h42.5 r90
  text "LET THERE" at 1700,3600 h64.6 r180
  text "VBUS" at 4575,3463 h42.5 r90
  text "GND" at 4575,3088 h42.5 r90
  text "SCL" at 4575,2913 h42.5 r90
  text "SDA" at 4575,2725 h42.5 r90
  text "GND" at 2575,2338 h42.5
  text "PWM" at 2413,2163 h42.5
  text "P3.3" at 1775,1750 h42.5 r90
  text "ACLK" at 2025,1138 h42.5 r90
  text "GND" at 3175,1113 h42.5 r90
  text "TXD" at 3275,1113 h42.5 r90
  text "RXD" at 3375,1113 h42.5 r90
  text "SMCLK" at 2575,1100 h42.5 r90
Bottom:
  pour cut-out net N$56: 1000,1000 1010,1000 1010,1010 1000,1010
  pour cut-out net N$56: 1000,1000 1010,1000 1010,1010 1000,1010
  pour cut-out net N$1: 1000,1000 1010,1000 1010,1010 1000,1010
  pour cut-out net N$2: 1000,1000 1010,1000 1010,1010 1000,1010

## Silkscreen, mask and mechanical layers (free items; w line width, h text height)
Top Solder:
  text "GND" at 1725,4200 h42.5 r90
  text "SUN" at 1825,4200 h42.5 r90
  text "VLED" at 1925,4200 h42.5 r90
  text "GND" at 4588,4188 h42.5 r90
  text "LED+" at 2775,3763 h42.5 r180
  text "BE LIGHT" at 1700,3700 h64.6 r180
  text "VSUPERCAP" at 4025,3625 h42.5 r90
  text "LET THERE" at 1700,3600 h64.6 r180
  text "VBUS" at 4575,3463 h42.5 r90
  text "GND" at 4575,3088 h42.5 r90
  text "SCL" at 4575,2913 h42.5 r90
  text "SDA" at 4575,2725 h42.5 r90
  text "GND" at 2575,2538 h42.5
  text "PWM" at 2413,2363 h42.5
  text "P3.3" at 1775,1950 h42.5 r90
  text "ACLK" at 2025,1338 h42.5 r90
  text "SMCLK" at 2575,1300 h42.5 r90
  text "GND" at 3175,1113 h42.5 r90
  text "TXD" at 3275,1113 h42.5 r90
  text "RXD" at 3375,1113 h42.5 r90
Dimension:
  lines w0: 1000,1119 ccw(c1119,1119) 1119,1000 4583,1000 ccw(c4582.5,1118.5) 4701,1119 4701,4347 ccw(c4583,4347) 4583,4465 4111,4465 ccw(c4110.5,4425.5) 4071,4426 4071,4189 cw(c3953,4189) 3953,4071 3560,4071 cw(c3559.5,4189.5) 3441,4189 3441,4268 ccw(c3401.5,4268.5) 3402,4308 2736,4308 2733,4308 2303,4308 cw(c2302.5,4386.5) 2224,4386 2224,4426 ccw(c2185,4426) 2185,4465 1119,4465 ccw(c1118.5,4346.5) 1000,4347 1000,1119

## Text inside footprints (layer, text, board x,y; h text height)
C1: tNames ">NAME" at 1353,4148 h77.5 r270; tValues ">VALUE" at 1223,4148 h77.5 r270
C2: tNames ">NAME" at 1835,2115 h77.5 r180; tValues ">VALUE" at 1835,2230 h77.5 r180
C3: tNames ">NAME" at 1465,1960 h77.5; tValues ">VALUE" at 1465,1845 h77.5
C4: tNames ">NAME" at 1835,2215 h77.5 r180; tValues ">VALUE" at 1835,2330 h77.5 r180
C5: tNames ">NAME" at 1990,2365 h77.5 r90; tValues ">VALUE" at 2105,2365 h77.5 r90
C6: tNames ">NAME" at 1465,2210 h77.5; tValues ">VALUE" at 1465,2095 h77.5
C7: tNames ">NAME" at 1635,1985 h77.5 r270; tValues ">VALUE" at 1520,1985 h77.5 r270
C8: tNames ">NAME" at 3010,2490 h77.5 r180; tValues ">VALUE" at 3010,2605 h77.5 r180
C9: Top Overlay "+" at 3463,2475 h77.5 r270; tNames ">NAME" at 3528,2460 h77.5 r270; tValues ">VALUE" at 3398,2460 h77.5 r270
C10: Top Overlay "+" at 4025,1775 h77.5 r180; tNames ">NAME" at 4010,1710 h77.5 r180; tValues ">VALUE" at 4010,1840 h77.5 r180
C11: tNames ">NAME" at 3163,2225 h77.5 r90; tValues ">VALUE" at 3313,2225 h77.5 r90
C12: tNames ">NAME" at 3885,2565 h77.5 r180; tValues ">VALUE" at 3885,2680 h77.5 r180
C13: tNames ">NAME" at 3935,2115 h77.5 r180; tValues ">VALUE" at 3935,2230 h77.5 r180
C14: Top Overlay "+" at 4025,2075 h77.5 r180; tNames ">NAME" at 4010,2010 h77.5 r180; tValues ">VALUE" at 4010,2140 h77.5 r180
C15: tNames ">NAME" at 3385,2135 h77.5 r180; tValues ">VALUE" at 3385,2265 h77.5 r180
JP1: tNames ">NAME" at 1898,1688 h77.5 r90; tValues ">VALUE" at 2078,1688 h77.5 r90
JP2: tNames ">NAME" at 2588,2010 h77.5 r180; tValues ">VALUE" at 2588,2190 h77.5 r180
LED1: tNames ">NAME" at 2102.5,1823 h24.8 r270; tValues ">VALUE" at 2032,1828 h24.8 r270
LED2: tNames ">NAME" at 2413,2688 h77.5 r180; tValues ">VALUE" at 2413,2788 h77.5 r180
Q1: tNames ">NAME" at 1750,2100 h108.5 r90; tValues ">VALUE" at 1825,2100 h108.5 r90
R1: tNames ">NAME" at 1350,4000 h77.5 r90; tValues ">VALUE" at 1500,3975 h77.5 r90
R2: tNames ">NAME" at 1815,1985 h77.5; tValues ">VALUE" at 1815,1870 h77.5
R3: tNames ">NAME" at 1785,1915 h77.5 r180; tValues ">VALUE" at 1785,2030 h77.5 r180
R4: tNames ">NAME" at 2110,1935 h77.5 r270; tValues ">VALUE" at 1995,1935 h77.5 r270
R5: tNames ">NAME" at 1815,2035 h77.5; tValues ">VALUE" at 1815,1920 h77.5
R6: tNames ">NAME" at 1785,1965 h77.5 r180; tValues ">VALUE" at 1785,2080 h77.5 r180
R7: tNames ">NAME" at 2378,1853 h77.5 r90; tValues ">VALUE" at 2493,1853 h77.5 r90
R8: tNames ">NAME" at 2440,1853 h77.5 r90; tValues ">VALUE" at 2555,1853 h77.5 r90
R9: tNames ">NAME" at 2785,2310 h77.5 r270; tValues ">VALUE" at 2670,2310 h77.5 r270
R10: tNames ">NAME" at 1960,2435 h77.5 r270; tValues ">VALUE" at 1845,2435 h77.5 r270
R11: tNames ">NAME" at 2785,2410 h77.5 r270; tValues ">VALUE" at 2670,2410 h77.5 r270
R12: tNames ">NAME" at 1435,1890 h77.5 r180; tValues ">VALUE" at 1435,2005 h77.5 r180
R13: tNames ">NAME" at 2215,1365 h77.5 r90; tValues ">VALUE" at 2330,1365 h77.5 r90
R14: tNames ">NAME" at 2135,2435 h77.5 r270; tValues ">VALUE" at 2020,2435 h77.5 r270
R15: tNames ">NAME" at 1465,2410 h77.5; tValues ">VALUE" at 1465,2295 h77.5
R16: tNames ">NAME" at 3053,2460 h77.5; tValues ">VALUE" at 3053,2345 h77.5
R17: tNames ">NAME" at 1440,2240 h77.5 r90; tValues ">VALUE" at 1555,2240 h77.5 r90
R18: tNames ">NAME" at 2510,2678 h77.5 r180; tValues ">VALUE" at 2510,2793 h77.5 r180
R19: tNames ">NAME" at 2785,2065 h77.5 r180; tValues ">VALUE" at 2785,2180 h77.5 r180
R20: tNames ">NAME" at 1365,2410 h77.5; tValues ">VALUE" at 1365,2295 h77.5
R21: tNames ">NAME" at 3150,2700 h77.5 r180; tValues ">VALUE" at 3150,2750 h77.5 r180
R22: tNames ">NAME" at 2815,2090 h77.5 r90; tValues ">VALUE" at 2930,2090 h77.5 r90
R23: tNames ">NAME" at 2990,2290 h77.5 r90; tValues ">VALUE" at 3105,2290 h77.5 r90
R24: tNames ">NAME" at 2685,2035 h77.5 r270; tValues ">VALUE" at 2570,2035 h77.5 r270
R25: tNames ">NAME" at 2885,2035 h77.5 r270; tValues ">VALUE" at 2770,2035 h77.5 r270
R26: tNames ">NAME" at 2785,1990 h77.5 r180; tValues ">VALUE" at 2785,2105 h77.5 r180
R27: tNames ">NAME" at 3798,1715 h77.5 r180; tValues ">VALUE" at 3798,1830 h77.5 r180
R28: tNames ">NAME" at 3798,2323 h77.5 r270; tValues ">VALUE" at 3683,2323 h77.5 r270
R29: tNames ">NAME" at 3815,2585 h77.5; tValues ">VALUE" at 3815,2470 h77.5
R30: tNames ">NAME" at 1815,2465 h77.5 r90; tValues ">VALUE" at 1930,2465 h77.5 r90
TP1: tNames ">NAME" at 1960,1450 h77.5; tValues ">VALUE" at 2000,1400 h1.55; tTest ">TP_SIGNAL_NAME" at 1950,1300 h62
TP2: tNames ">NAME" at 2598,2288 h77.5; tValues ">VALUE" at 2638,2238 h1.55; tTest ">TP_SIGNAL_NAME" at 2588,2138 h62
TP3: tNames ">NAME" at 2510,1450 h77.5; tValues ">VALUE" at 2550,1400 h1.55; tTest ">TP_SIGNAL_NAME" at 2500,1300 h62
TP4: tNames ">NAME" at 2573,2800 h77.5; tValues ">VALUE" at 2613,2750 h1.55; tTest ">TP_SIGNAL_NAME" at 2563,2650 h62
TP5: tNames ">NAME" at 3060,3425 h77.5; tValues ">VALUE" at 3100,3375 h1.55; tTest ">TP_SIGNAL_NAME" at 3050,3275 h62
TP6: tNames ">NAME" at 3060,3650 h77.5; tValues ">VALUE" at 3100,3600 h1.55; tTest ">TP_SIGNAL_NAME" at 3050,3500 h62
TP7: tNames ">NAME" at 3810,3500 h77.5; tValues ">VALUE" at 3850,3450 h1.55; tTest ">TP_SIGNAL_NAME" at 3800,3350 h62
TR1: tNames ">NAME" at 2975,2400 h77.5 r270; tValues ">VALUE" at 2775,2400 h77.5 r270
TR2: tNames ">NAME" at 3300,3600 h77.5; tValues ">VALUE" at 3300,3250 h77.5
U1: tNames ">NAME" at 2226,2261.38 h77.5 r270; tValues ">VALUE" at 2136.69,2267.29 h77.5 r270
U2: tNames ">NAME" at 1575,2125 h77.5 r270; tValues ">VALUE" at 1375,2125 h77.5 r270
U3: tNames ">NAME" at 2825,2725 h77.5; tValues ">VALUE" at 2825,2515 h77.5
U4: tNames ">NAME" at 2975,2175 h77.5; tValues ">VALUE" at 2962.5,1887 h77.5
U5: tNames ">NAME" at 3425,2375 h77.5 r270; tValues ">VALUE" at 3215,2375 h77.5 r270
U6: tNames ">NAME" at 1813,2575 h77.5 r270; tValues ">VALUE" at 1603,2575 h77.5 r270
U7: tNames ">NAME" at 4025,2425 h77.5 r270; tValues ">VALUE" at 3737,2437.5 h77.5 r270
U8: tNames ">NAME" at 3825,1975 h77.5; tValues ">VALUE" at 3825,1775 h77.5
X1: tNames ">NAME" at 4172,4301 h108.5; tValues ">VALUE" at 4172,4226 h108.5
X2: Top Overlay "1" at 2751,1301 h77.5 r180; tNames ">NAME" at 3047.06,1055 h77.5 r180; tValues ">VALUE" at 3047.06,1117 h77.5 r180
X3: tNames ">NAME" at 4478,2347 h77.5 r90; tValues ">VALUE" at 4675,2350 h77.5 r90
X4: Top Overlay "1" at 1900,3999 h77.5; tNames ">NAME" at 1603.94,4245 h77.5; tValues ">VALUE" at 1603.94,4183 h77.5
X5: tNames ">NAME" at 2000,1316 h77.5; tValues ">VALUE" at 2000,966 h77.5
X6: tNames ">NAME" at 2150,3350 h77.5 r90; tValues ">VALUE" at 2200,3350 h77.5 r90
X7: tNames ">NAME" at 2500,3350 h77.5 r90; tValues ">VALUE" at 2550,3350 h77.5 r90
X8: tNames ">NAME" at 3381,3782 h77.5 r90; tValues ">VALUE" at 3456,3757 h77.5 r90